# Altium PCB PCB3.PcbDoc
Units mil, origin at the board's own origin, x right, y up, seen from the top; angles counter-clockwise.
Board outline 1370.03 x 830.03 mil, 2 copper layers (Top Layer, Bottom Layer); 7 components, 7 nets, 28 pads, 0 vias.
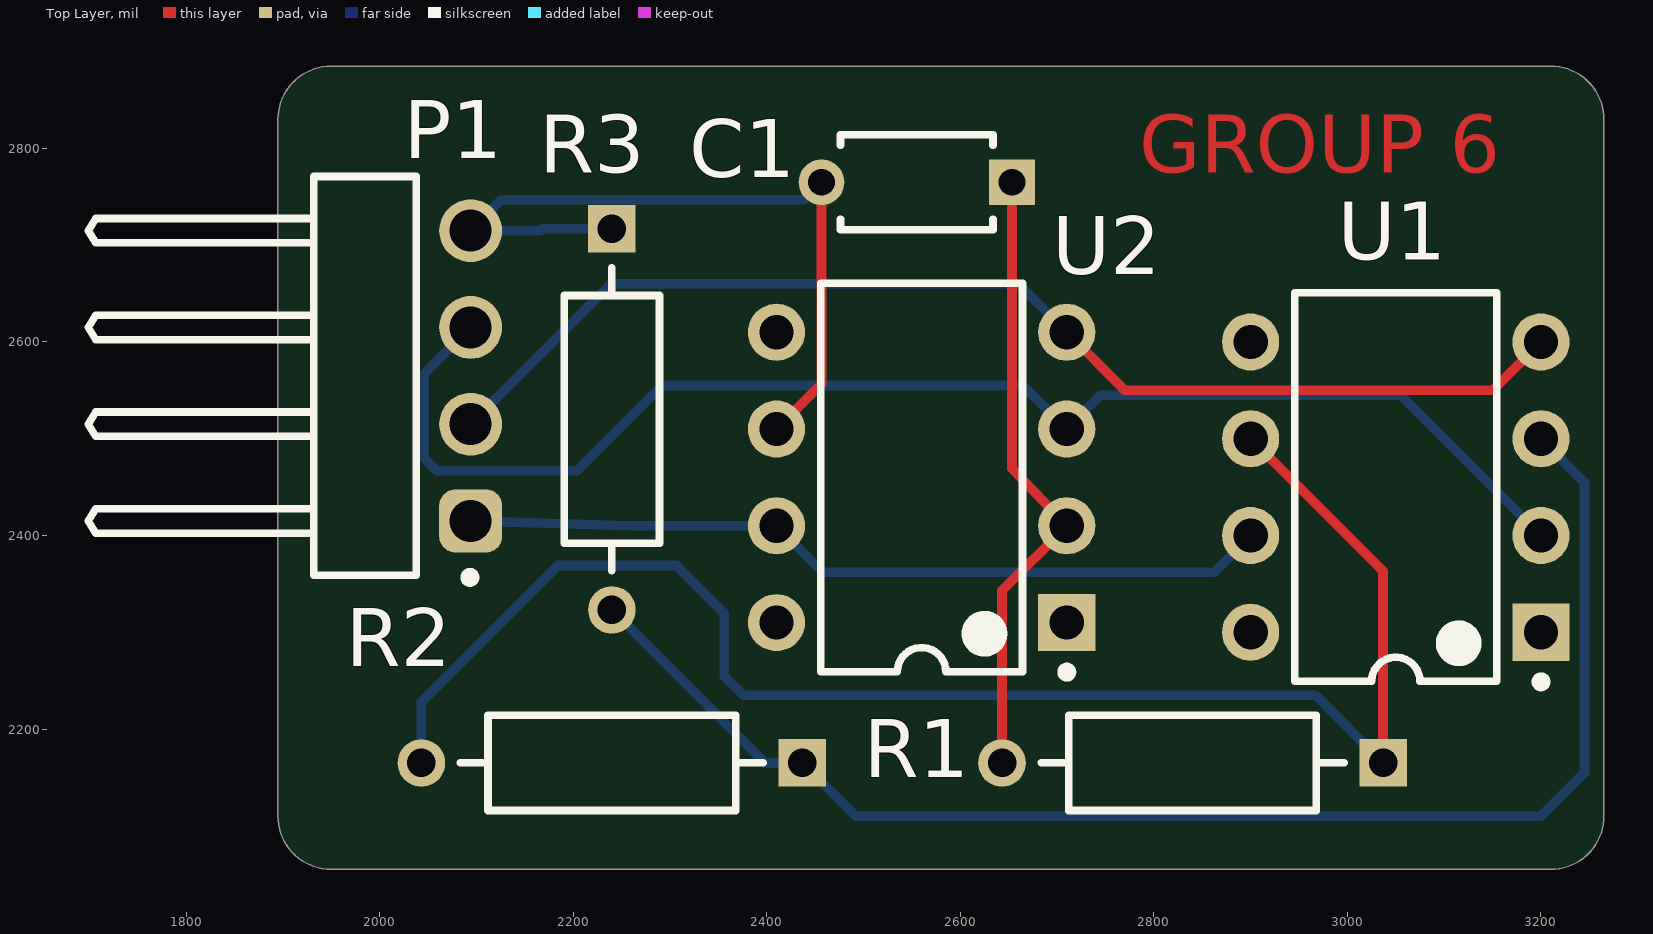
[diagram p0: Top Layer view]
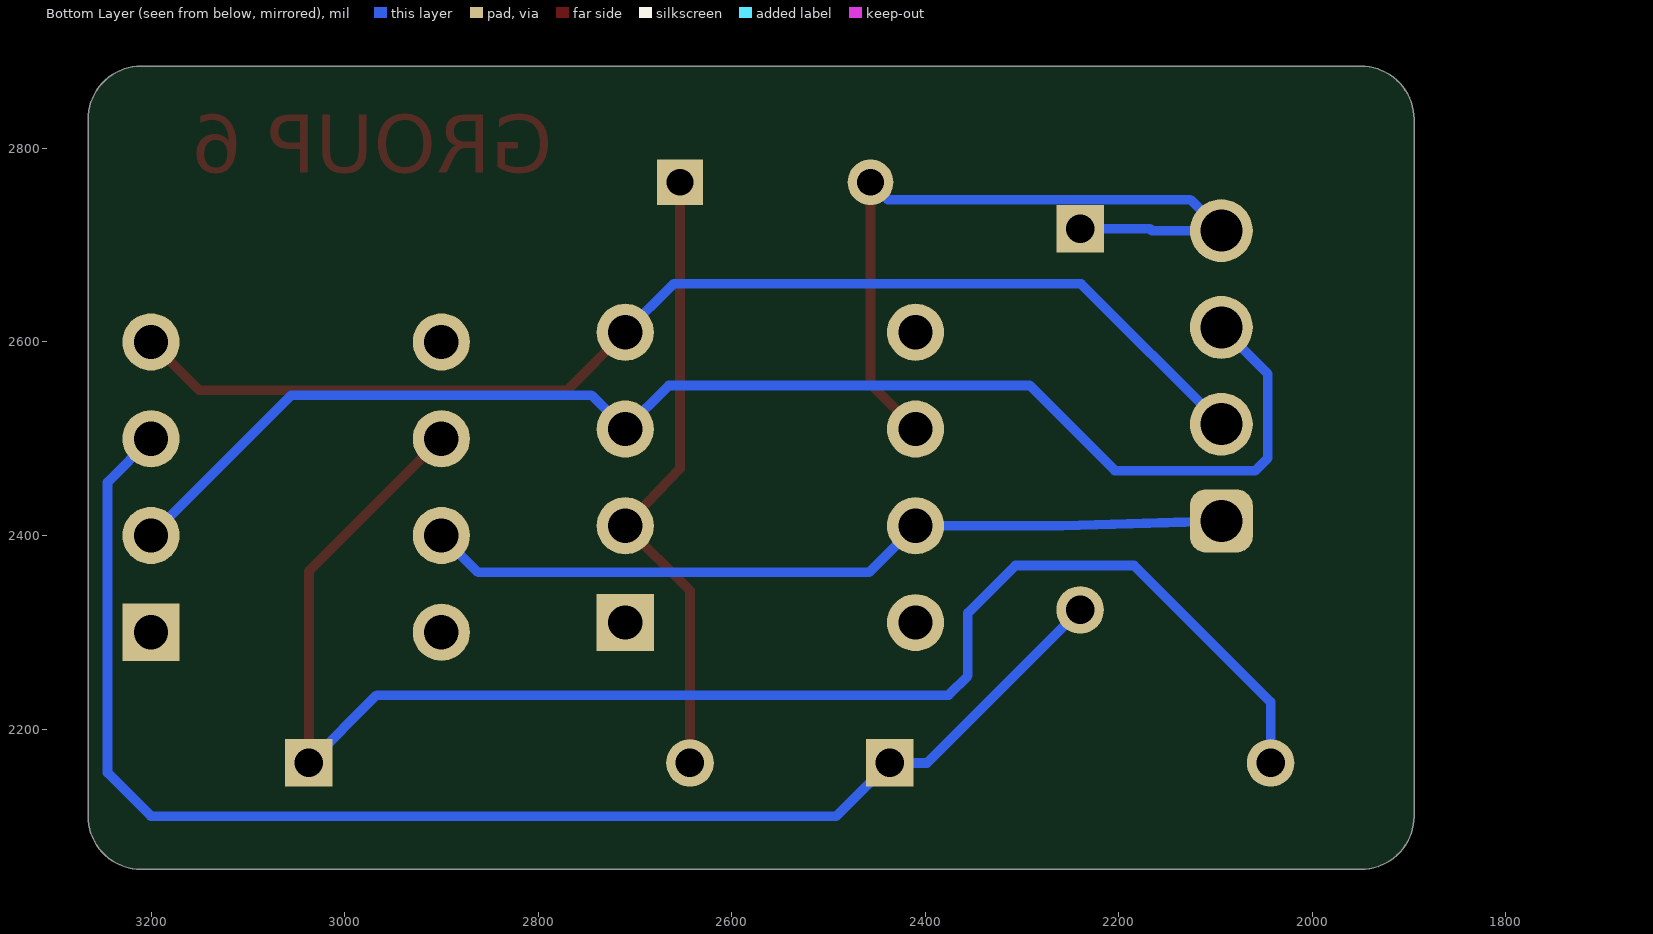
[diagram p1: Bottom Layer view, seen from below]
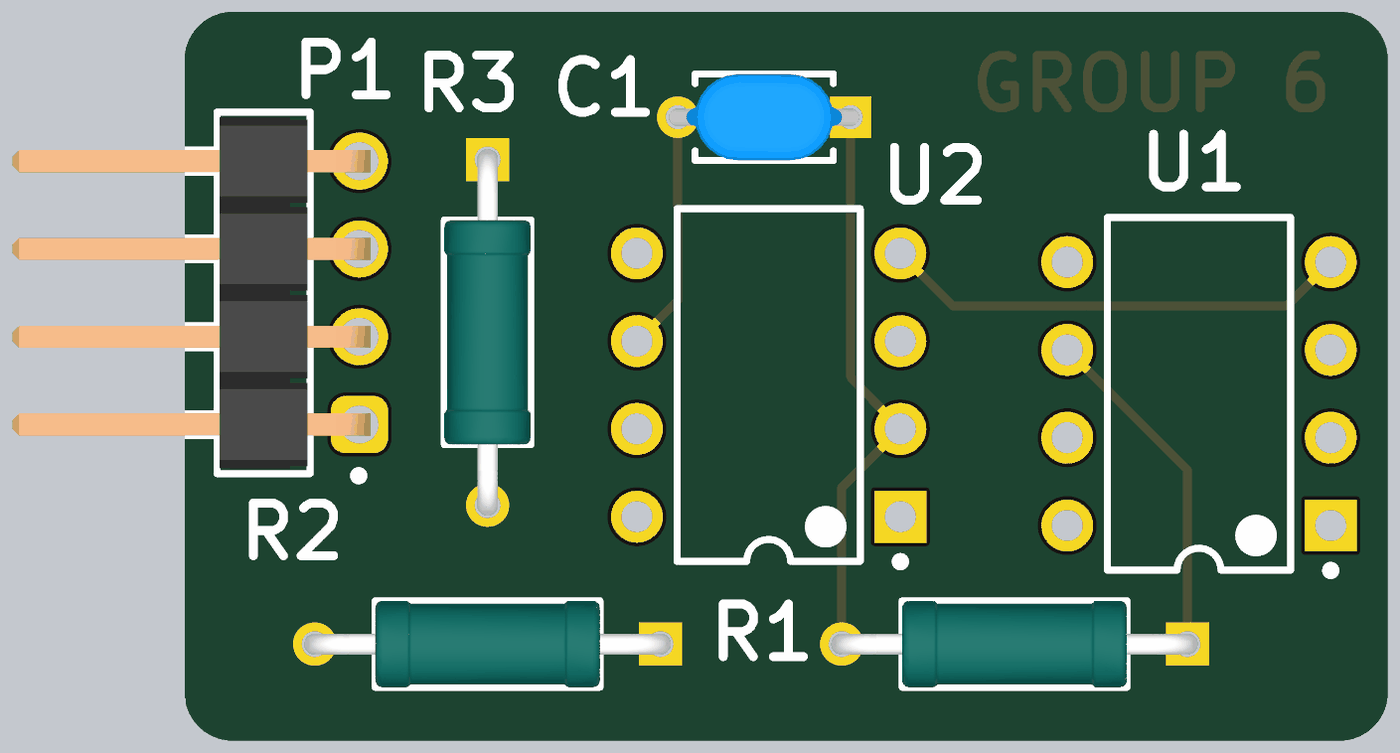
[diagram p2: 3D render of the assembled board from above, using the file's embedded part models]

## Layer stack, top to bottom
Top Solder: solder mask 0.4, Solder Resist, Dk 3.5
Top Layer: signal copper 1.4
Dielectric 1: dielectric 12.6, FR-4, Dk 4.8
Bottom Layer: signal copper 1.4
Bottom Solder: solder mask 0.4, Solder Resist, Dk 3.5

## Board outline
1894.98,2110 1894.98,2830 cw(c1950,2830) 1950,2885.01 3210,2885.01 cw(c3210,2830) 3265.01,2830 3265.01,2110 cw(c3210,2110) 3210,2054.99 1950,2054.99 cw(c1950,2110)

## Design rules (kind name [scope] priority, off if disabled: settings)
Clearance [All] p1: gap=10 ignorepadtopadclearanceinfootprint=FALSE
PolygonConnect [All] p1: connectstyle=Relief reliefconductorwidth=10 reliefentries=4 polygonreliefangle="90 Angle" airgapwidth=10
RoutingVias [All] p1: holewidth=28 width=50 viastyle="Through Hole" minholewidth=28 minwidth=50 maxholewidth=28 maxwidth=50
SolderMaskExpansion [All] p1: expansion=4 istentingtop=FALSE
SupplyNets "Schematic Supply Nets" [InNet('GND')] p1: voltage=0.000
Width [All] p1: maxlimit=20 minlimit=10 preferedwidth=10
30 further rules are at their usual default settings.

## Components (designator, comment, footprint, x,y, rotation, side; value= is the part's Value field where it differs from the comment)
C1 "0.1uF" FP-RDE0M1-MFG 2555,2765 r180 top
P1 "61300411021" 61300411021 1985,2565 r270 top
R1 "12K" FP-MRS25-MFG 2840,2165 r180 top
R2 "1K" FP-MRS25-MFG 2240,2165 r180 top
R3 "180" FP-MRS25-MFG 2240,2520 r270 top
U1 "LM741CN/NOPB" P0008A 3050,2450 r180 top
U2 "LM741CN/NOPB" P0008A 2560,2460 r180 top

## Footprints (in the part's own frame and the unit in brackets; to place one, negate y for a bottom-side part, rotate by r counter-clockwise, add the part's x,y. Pads: shape width x height; smd on the part's side, far side on the other; paste and mask are expansions set on the pad)
61300411021 [mm] "Pin Header, pitch 2.54 mm, THT, Angled, single row, 4p"
  rrect50% 1.65x1.65 hole 1.1: 1(3.81,2.77)
  round 1.65 hole 1.1: 2(1.27,2.77) 3(-1.27,2.77) 4(-3.81,2.77)
  silkscreen extent -5.23,-7.27 5.41,2.88, body extent -5.08,-7.27 5.08,3.09, height 2.58
FP-MRS25-MFG [mm]
  rect 1.25x1.25 hole 0.75 paste-2539.97 mask+0: 1(-5,0)
  round 1.25 hole 0.75 paste-2539.97 mask+0: 2(5,0)
  silkscreen extent -3.97,-1.25 3.97,1.25, body extent -5.72,-1.35 5.72,1.35, height 0.25
FP-RDE0M1-MFG [mm]
  rect 1.2x1.2 hole 0.7 paste-2539.97 mask+0: 1(-2.5,0)
  round 1.2 hole 0.7 paste-2539.97 mask+0: 2(2.5,0)
  silkscreen extent -2,-1.25 2,1.25, body extent -3.2,-1.35 3.2,1.35, height 0.25
P0008A [mm] "DIP, 8-Leads, Body 10.15x6.6mm, Pitch 2.54mm"
  rect 1.5x1.5 hole 0.9: 1(-3.81,3.81)
  round 1.5 hole 0.9: 2(-3.81,1.27) 3(-3.81,-1.27) 4(-3.81,-3.81) 5(3.81,-3.81) 6(3.81,-1.27) 7(3.81,1.27) 8(3.81,3.81)
  silkscreen extent -3.94,-5.1 2.65,5.23, body extent -3.95,-5.07 3.95,5.07, height 5.08

## Part data
C1: library part CMP-06035-051680-1, "Ceramic Capacitor 100nF ±10% 50V X7R Radial", Capacitance=100nF, Case/Package=Radial, Dielectric=X7R, Max Operating Temperature=125°C, Min Operating Temperature=-55°C, Package Quantity=2000, Resistor Type=Ceramic, Tolerance=10%, Voltage Rating=50V, Height=3.5mm, Height - Seated (Max)=0.236inch, Lead Diameter=0.5mm, Lead Free="Lead Free", Lead Pitch=0.197inch, Lead/Base Style=Kinked, Length=0.157inch, Mount="Through Hole", Packaging="Tape and Reel", Termination=Radial, Voltage Rating (DC)=50V, Width=3.5mm
P1: library part CMP-1502-01063-3, Color=Black, Contact Resistance=20mΩ, Current Rating=3A, Operating Supply Voltage=250V, Connector Type="Male Pin", Contact Material=Copper, Contact Mating Length=5.9944mm, Contact Plating=Gold, Gender=Male, Lead Pitch=2.54mm, Mount="Through Hole", NexarPartId=31153320, Number of Contacts=4, Number of Pins=4, Number of Positions=4, Number of Rows=1, Pitch=2.54mm, REACH SVHC=Unknown, RoHS=Compliant, Termination=Solder
R1 R2 R3: library part CMP-02408-000051-1, "RES 1K OHM 0.6W 1% AXIAL", Case/Package=Axial, Max Operating Temperature=155°C, Max Power Dissipation=600mW, Min Operating Temperature=-55°C, Package Quantity=5000, Resistance=1kR, Resistance Tolerance=1%, Resistor Type="Metal Film", Temperature Coefficient=50ppm/°C, Voltage Rating=350V, Construction=Cylindrical, Contact Plating=Tin, Diameter=2.5mm, Lead Diameter=0.6mm, Lead Free="Lead Free", Length=6.5mm, Military Standard=Not, Mount="Through Hole", Number of Pins=2, Number of Terminations=2, Packaging="Tape and Reel", Power Rating=600mW, Radiation Hardening=No, RoHS Compliant=Yes, Series=MRS25, Technology="THIN FILM", Termination=Axial, Tolerance=1%, Voltage Rating (DC)=350V, Weight=0.00776oz, Width=2.5mm
U1 U2: library part CMP-0055-00162-3, "Operational Amplifier, 8-pin MDIP, Pb-Free", Manufacturer="Texas Instruments", Package Reference=P0008A, PackageTopMarking=NSUZXYTTE#*LM*741CN, PowerWise=N, Code_JEDEC=MS-001-BA, ComponentLink1Description="Datasheet URL", ComponentLink1URL=http://www.ti.com/general/docs/lit/getliterature.tsp?genericPartNumber=LM741&fileType=pdf, CompType=Amplifiers, PackageDescription="MDIP, .365 x .250 x .130in, 8 Lead, .100in Pitch", PinCount=8, RoHS=Y

## Nets (pads, with @x,y where several pads share a name; then routed paths per layer and width w, separated by ;. In a path a pad name is that pad's centre, name@x,y a point inside that pad or via, vN(x,y) a via of type N, cw(c..) or ccw(c..) an arc to the next point about the centre after c; other vN are vias at no path point)
+vcc: P1.1 U1.7 U2.7 | length 841.6
  Bottom Layer w10: P1.1 2258,2410 U2.7 2458,2362 2862,2362 U1.7
-VCC: P1.2 U1.4 U2.4 | length 1232.3
  Top Layer w10: U2.4 2770,2550 3150,2550 U1.4
  Bottom Layer w10: P1.2 2239.06,2660 2660,2660 U2.4
GND: P1.3 U1.2 U2.3 | length 1443.9
  Bottom Layer w10: P1.3 2046,2566.94 2046,2480 2059,2467 2204,2467 2292,2555 2665,2555 U2.3 2745,2545 3055,2545 U1.2
NetC1_1: C1.1 R1.2 U2.2 | length 650.4
  Top Layer w10: R1.2 2643.15,2343.15 U2.2 2653.43,2469.28 C1.1
NetC1_2: C1.2 P1.4 R3.1 U2.6 | length 804.2
  Top Layer w10: U2.6 2456.57,2556.57 C1.2
  Bottom Layer w10: R3.1 2167.85,2716.85 2166,2715 P1.4 2126.06,2747 2438.57,2747 C1.2
NetR1_1: R1.1 R2.2 U1.6 | length 1629.4
  Top Layer w10: U1.6 3036.85,2363.15 R1.1
  Bottom Layer w10: R2.2 2043.15,2228 2184.15,2369 2307,2369 2356,2320 2356,2255 2376,2235 2966.85,2235 R1.1
NetR2_1: R2.1 R3.2 U1.3 | length 1475.6
  Bottom Layer w10: R3.2 2398.15,2165 R2.1 2491.85,2110 3200,2110 3245,2155 3245,2455 U1.3
pads on no net: U1.1 U1.5 U1.8 U2.1 U2.5 U2.8

## Other copper
Top Layer:
  text "GROUP 6" at 2785,2775 h60